# Altium PCB PCB1.PcbDoc
Units mm, origin at the board's own origin, x right, y up, seen from the top; angles counter-clockwise.
Board outline 15.37 x 16.89 mm, 2 copper layers (Top Layer, Bottom Layer); 12 components, 10 nets, 28 pads, 0 vias.
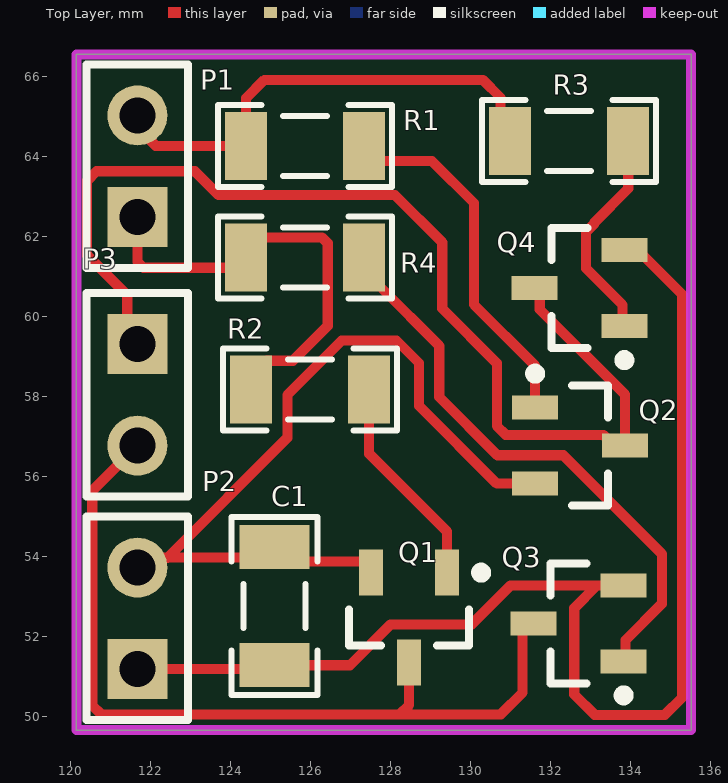
[diagram p0: Top Layer view]
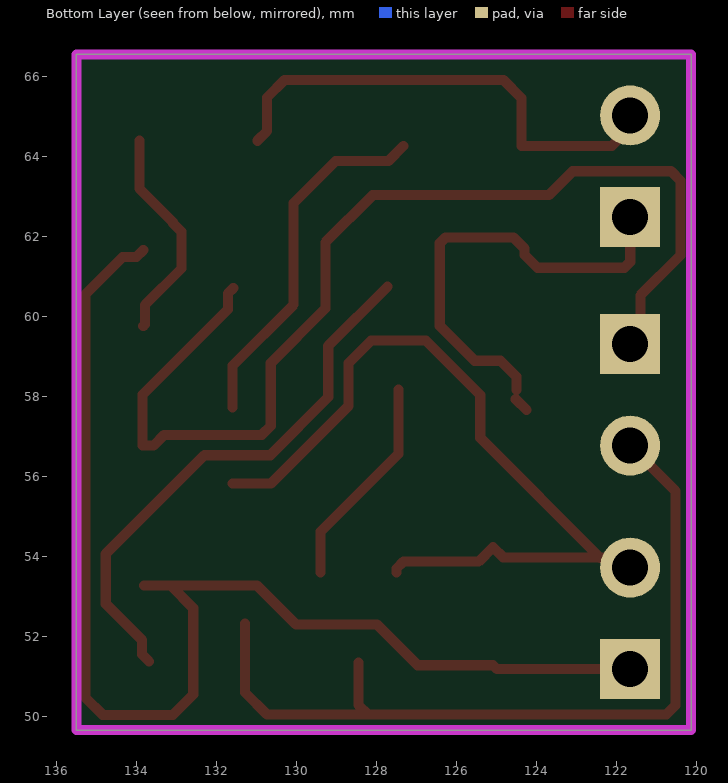
[diagram p1: Bottom Layer view, seen from below]
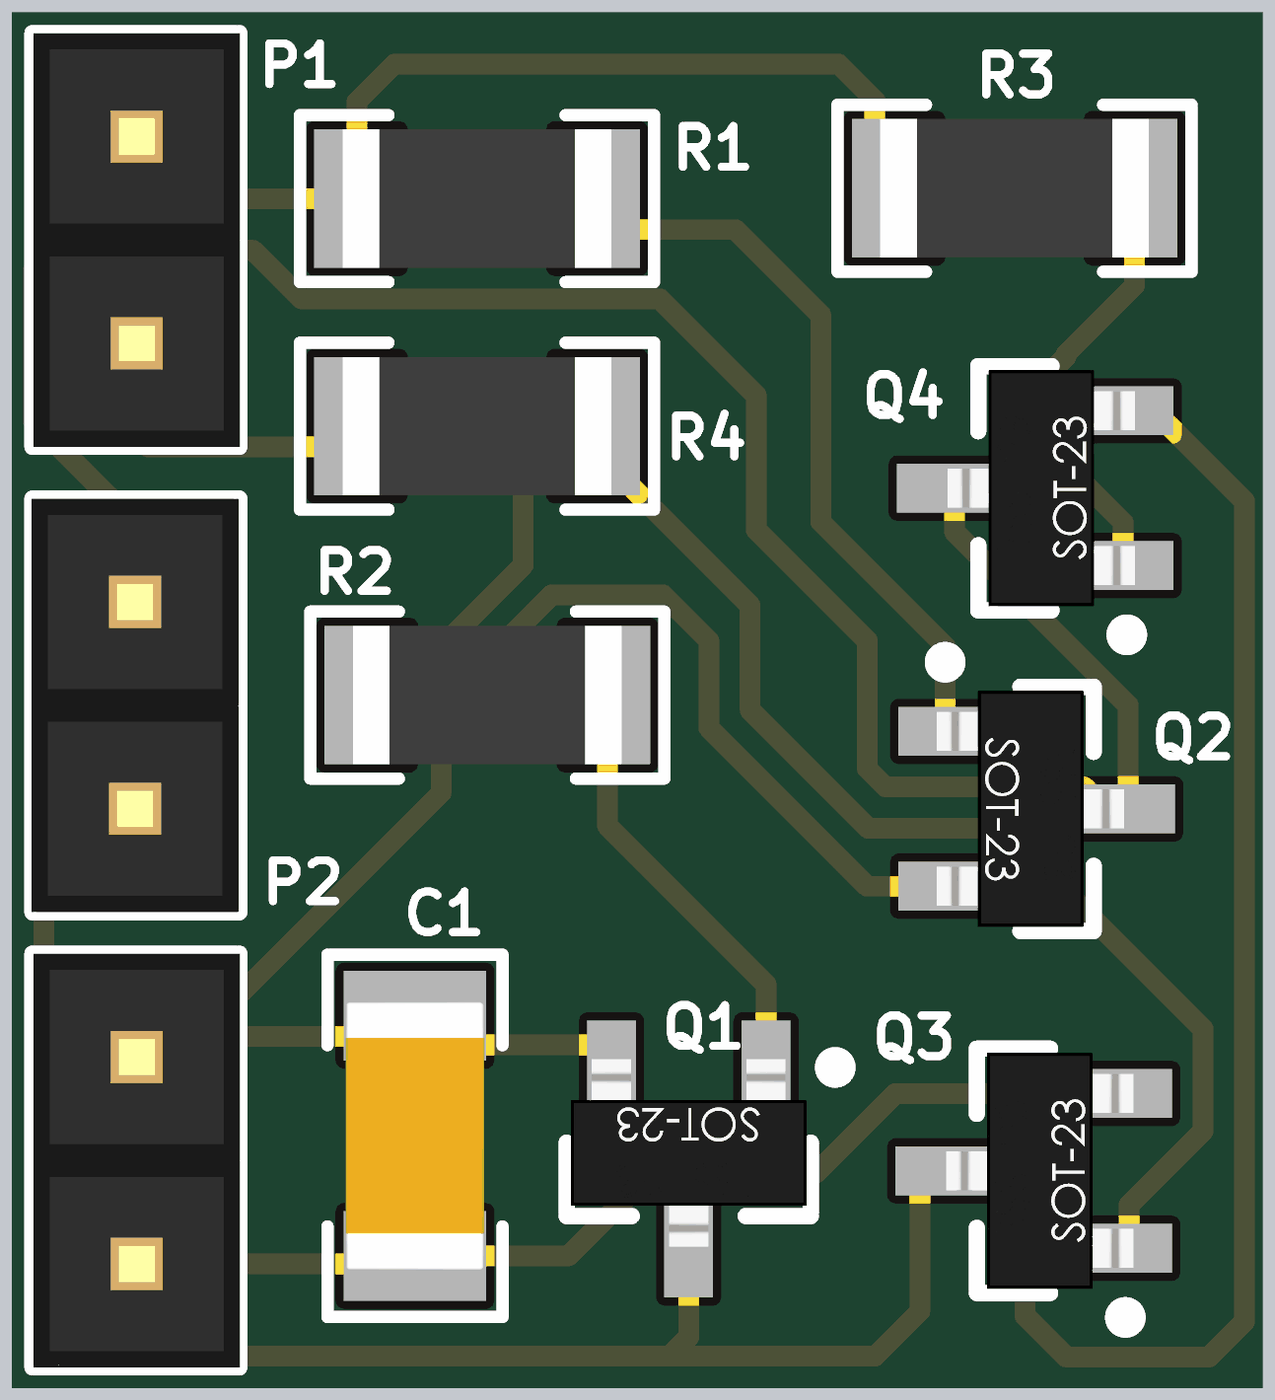
[diagram p2: 3D render of the assembled board from above, using the file's embedded part models]

## Layer stack, top to bottom
Top Solder: solder mask 0.0102, Solder Resist, Dk 3.5
Top Layer: signal copper 0.0356
Dielectric 1: dielectric 0.32, FR-4, Dk 4.8
Bottom Layer: signal copper 0.0356
Bottom Solder: solder mask 0.0102, Solder Resist, Dk 3.5

## Board outline
120.142,49.657 120.142,66.548 135.509,66.548 135.509,49.657

## Design rules (kind name [scope] priority, off if disabled: settings)
Clearance [All] p1: gap=0.254 ignorepadtopadclearanceinfootprint=FALSE except(0: Arc-Hole Track-Hole SMDPad-Hole THPad-Hole Via-Hole Fill-Hole Poly-Hole Region-Hole Text-Hole)
PolygonConnect [All] p1: connectstyle=Relief reliefconductorwidth=0.254 reliefentries=4 polygonreliefangle="90 Angle" airgapwidth=0.254
RoutingVias [All] p1: holewidth=0.711 width=1.27 viastyle="Through Hole" minholewidth=0.711 minwidth=1.27 maxholewidth=0.711 maxwidth=1.27
SolderMaskExpansion [All] p1: expansion=0.102 istentingtop=FALSE
Width [All] p1: maxlimit=0.254 minlimit=0.254 preferedwidth=0.254
30 further rules are at their usual default settings.

## Components (designator, comment, footprint, x,y, rotation, side; value= is the part's Value field where it differs from the comment)
C1 "10uF" CAP1206 125.095,52.754 r90 top
P1 "Header 2" HDR1X2 121.666,62.484 r90 top
P2 "Header 2" HDR1X2 121.666,51.181 r90 top
P3 "Header 2" HDR1X2 121.666,59.309 r270 top
Q1 "BC807" SOT23_BEC_N 128.458,52.469 r270 top
Q2 "BC807" SOT23_BEC_N 132.733,56.769 r0 top
Q3 "BC817" SOT23_BEC_N 132.697,52.324 r180 top
Q4 "BC817" SOT23_BEC_N 132.715,60.706 r180 top
R1 "1K" RES1206 125.857,64.262 r0 top
R2 "1K" RES1206 125.984,58.166 r180 top
R3 "1K" RES1206 132.461,64.389 r0 top
R4 "1K" RES1206 125.857,61.468 r180 top

## Footprints (in the part's own frame and the unit in brackets; to place one, negate y for a bottom-side part, rotate by r counter-clockwise, add the part's x,y. Pads: shape width x height; smd on the part's side, far side on the other; paste and mask are expansions set on the pad)
CAP1206 [mm] "Chip Capacitor, 2-Leads, Body 3/20x1/60mm, IPC Medium Density DESIGNER:ABBAS BASEREH"
  rect 1.1x1.75 smd: 1(-1.475,0) 2(1.475,0)
  silkscreen extent -2.22,-1.07 2.22,1.07, body extent -1.65,-0.85 1.65,0.85, height 0.94
HDR1X2 [mm] "Connector; Header; 2 Position"
  rect 1.5x1.5 hole 0.9: 1(0,0)
  round 1.5 hole 0.9: 2(2.54,0)
  silkscreen extent -1.27,-1.27 3.81,1.27, body extent -1.27,-1.28 3.81,1.26, height 8.79
RES1206 [mm] "Chip Resistor, 2-Leads, Body 3/20x1/60mm, IPC Medium Density DESIGNER:ABBAS BASEREH"
  rect 1.05x1.7 smd: 1(-1.475,0) 2(1.475,0)
  silkscreen extent -2.17,-1.02 2.17,1.02, body extent -1.65,-0.85 1.65,0.85, height 0.94
SOT23_BEC_N [mm] "SOT23, 3-Leads, Body 2.9x1.3mm, Pitch 0.95mm, Lead Span 2.4mm, IPC Medium Density"
  rect 1.15x0.6 smd: 1(-1.125,0.95) 2(-1.125,-0.95) 3(1.125,0)
  silkscreen extent -1.25,-1.5 0.7,1.93, body extent -1.23,-1.45 1.07,1.45, height 1

## Part data
C1: library part "CAP SMD PACKAGE", "TOTAL CAPACITOR SMD PACK", Data=2017-3-10, Desc.="CAP SMD TOTAL PACKAGES", Designer="Abbas Basereh"
P1 P2 P3: "Header, 2-Pin", LatestRevisionDate=17-Jul-2002, LatestRevisionNote="Re-released for DXP Platform.", Publisher="Altium Limited"
Q1 Q2: library part PNP, "PNP Bipolar Transistor", LatestRevisionDate=29-May-2009, LatestRevisionNote="IPC-7351 Footprint Added.", PackageDescription="3-Pin SOT-23 Package 0.95 mm Pitch, 2.4 mm Lead Span", PackageReference=SOT-23B, PackageVersion=Aug-1999, Published=8-Jun-2000, Publisher="Altium Limited"
Q3 Q4: library part NPN, "NPN Bipolar Transistor", LatestRevisionDate=29-May-2009, LatestRevisionNote="IPC-7351 Footprint Added.", PackageDescription="3-Pin SOT-23 Package 0.95 mm Pitch, 2.4 mm Lead Span", PackageReference=SOT-23B, PackageVersion=Aug-1999, Published=8-Jun-2000, Publisher="Altium Limited"
R1 R2 R3 R4: library part "RES SMD PACKAGE", "TOTAL SMD RESISTOR PACK", Data=2017-3-10, Desc.="RES SMD PAKAGES", Designer="Abbas Basereh"

## Nets (pads, with @x,y where several pads share a name; then routed paths per layer and width w, separated by ;. In a path a pad name is that pad's centre, name@x,y a point inside that pad or via, vN(x,y) a via of type N, cw(c..) or ccw(c..) an arc to the next point about the centre after c; other vN are vias at no path point)
GND: C1.1 P2.1 Q3.2 Q4.2 | length 31.2
  Top Layer w0.254: P2.1@121.744,51.103 P2.1 124.997,51.181 C1.1 126.979,51.279 128,52.3 130.024,52.3 130.998,53.274 133.157,53.274 ; Q3.2 133.547,53.274 133.157,53.274 ; Q4.2 134.013,61.483 134.351,61.483 135.286,60.548 135.286,50.472 134.852,50.038 133.096,50.038 132.588,50.546 132.588,52.705 133.157,53.274
NetLabel1: Q2.1 R1.2 | length 9.1
  Top Layer w0.254: R1.2 127.713,63.881 129.032,63.881 130.08,62.833 130.08,60.293 131.608,58.765 Q2.1
NetP1_1: P1.1 R2.2 R4.2 | length 11.6
  Top Layer w0.254: P1.1 121.666,61.363 121.815,61.214 123.984,61.214 124.304,61.534 124.304,61.693 124.587,61.976 126.277,61.976 126.426,61.827 126.426,59.765 125.55,58.889 124.907,58.889 124.509,58.491 R2.2 ; R2.2@124.255,57.658 R2.2@124.526,57.929
NetP1_2: P1.2 R1.1 R3.1 | length 12.5
  Top Layer w0.254: P1.2@121.36,65.024 122.122,64.262 R1.1 124.382,65.454 124.841,65.913 130.302,65.913 130.744,65.471 130.744,64.631 R3.1 ; P1.2@121.412,65.024 P1.2@121.487,65.024
NetP3_1: P3.1 Q2.3 Q4.3 | length 27.7
  Top Layer w0.254: P3.1@121.412,59.282 121.412,60.525 120.408,61.529 120.408,63.392 120.643,63.627 123.103,63.627 123.699,63.031 128.104,63.031 129.286,61.849 129.286,60.198 130.652,58.832 130.652,57.705 130.652,57.261 130.875,57.038 133.314,57.038 133.583,56.769 Q2.3 133.858,58.039 131.723,60.174 131.723,60.573 Q4.3
NetP3_2: P3.2 Q1.3 Q3.3 | length 21.2
  Top Layer w0.254: P3.2 120.535,55.638 120.535,50.273 120.758,50.05 128.226,50.05 ; Q1.3 128.458,50.282 128.226,50.05 ; Q3.3@131.297,52.324 131.297,50.598 130.749,50.05 128.226,50.05
NetQ1_1: Q1.1 R2.1 | length 5.4
  Top Layer w0.254: R2.1 127.459,56.564 129.408,54.615 Q1.1
NetQ3_1: Q3.1 R4.1 | length 13.7
  Top Layer w0.254: R4.1@127.73,60.745 129.212,59.263 129.212,57.982 130.665,56.53 132.311,56.53 134.778,54.063 134.778,52.816 133.868,51.906 133.868,51.547 Q3.1@133.695,51.374
NetQ4_1: Q4.1 R3.2 | length 5.5
  Top Layer w0.254: Q4.1 133.794,59.802 133.794,60.288 132.884,61.198 132.884,62.114 133.096,62.326 133.096,62.357 133.936,63.197 R3.2
VCC: C1.2 P2.2 Q1.2 Q2.2 | length 21.4
  Top Layer w0.254: P2.2@122.232,53.975 122.33,53.975 124.841,53.975 C1.2 125.455,53.869 127.335,53.869 127.508,53.696 Q1.2 ; P2.2@122.266,53.94 121.885,53.94 P2.2 121.904,53.959 122.412,53.959 125.415,56.962 125.415,58.036 126.776,59.397 128.142,59.397 128.704,58.834 128.704,57.767 130.652,55.819 Q2.2

## Keep-outs
Keep-Out Layer:
  the board outline again, w0.254